# EAGLE board TRN_Open_Servo (EAGLE 7.1.0)
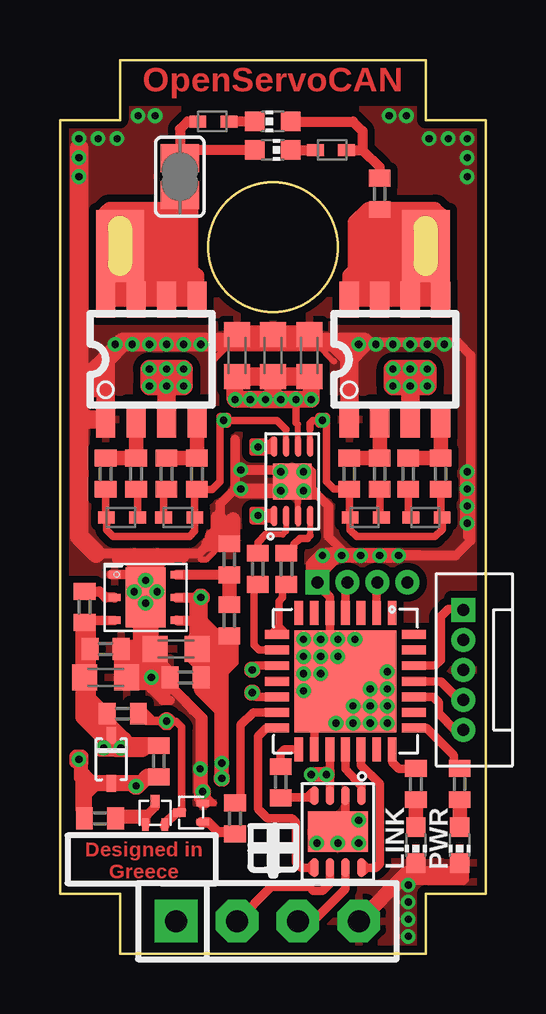
[diagram p0: board, top side]
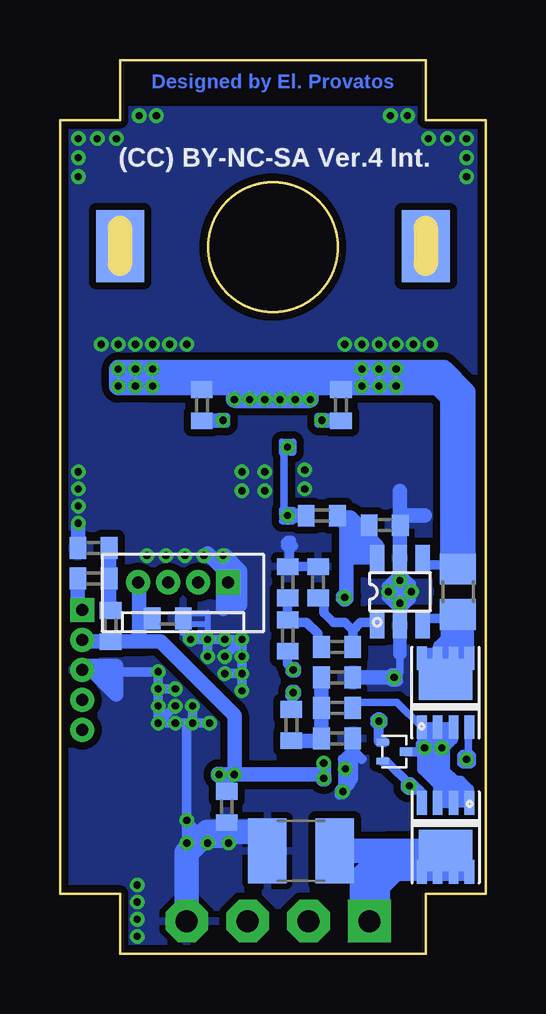
[diagram p1: board, bottom side, seen from below]

Size 17.75 x 37.25 mm. Coordinates in mm from the lower left corner, seen from the top.
Outline: 0,2.5 2.5,2.5 2.5,0 15.25,0 15.25,2.5 17.75,2.5 17.75,34.75 15.25,34.75 15.25,37.25 2.5,37.25 2.5,34.75 0,34.75 0,2.5
Outline: circle at 8.88,29.45 radius 2.7
Copper layers (1*16): Top 0.035mm / dielectric 1.5mm / Bottom 0.035mm
Design rules "SeeedStudio_2layer_DRU_no_angle_20140221": minimum track width 6mil, minimum drill 12mil, track to track 6mil, track to pad 6mil, pad to pad 6mil, via to via 6mil, smd to smd 0mil, copper to edge 10mil, drill to drill 10mil, minimum pad ring 10mil, minimum via ring 6mil, stop-mask expansion 2mil, vias tented up to drill 100mil, thermal gap 10mil
Holes 5.4 mm at 8.88,29.45
tRestrict: area 15.6,4.3 to 16,4.4; area 14,4.3 to 14.3,4.4; area 2.9,35.6 to 14.9,36.5; area 11,23 to 11,23.1; area 7.1,24.8 to 10.6,24.9; area 9.9,15.4 to 10,15.6; area 8,16.2 to 8.1,16.4; area 6.5,16.1 to 6.6,16.3; area 12.3,26.5 to 15.7,26.6; area 2.1,26.5 to 5.5,26.6; area 5.2,11.4 to 5.2,11.6; area 5.4,11 to 5.5,11.2
bRestrict: area 2.9,35.6 to 14.9,36.5

## Footprints (pad centres in the part's own frame; a part is rotated, then mirrored left to right if it is on the bottom)
C0402 = smd 0.7 x 0.9: 1 -0.65,0; 2 0.65,0
C0603K = smd 1.05 x 1.08: 1 -0.875,0; 2 0.875,0
C1210 = smd 1.6 x 2.7: 1 -1.4,0; 2 1.4,0
SOD523 = smd 0.7 x 0.5: A 0.7,0; C -0.6,0
SOD-323 = smd 0.403 x 0.71: A 0,0.995; K 0,-0.995
TDFN-8-EP = smd 0.85 x 0.25: 1 -1.45,0.75; 2 -1.45,0.25; 3 -1.45,-0.25; 4 -1.45,-0.75; 5 1.45,-0.75; 6 1.45,-0.25; 7 1.45,0.25; 8 1.45,0.75 | smd 1.5 x 1.6: EP 0,0
SOT-23-6 = smd 1.1 x 0.6: 1 -1.4,0.95; 2 -1.4,0; 3 -1.4,-0.95; 4 1.4,-0.95; 5 1.4,0; 6 1.4,0.95
DFN6-3X3 = smd 0.5 x 0.3: 1 -1.3,0.95; 2 -1.3,0; 3 -1.3,-0.95; 4 1.3,-0.95; 5 1.3,0; 6 1.3,0.95 | smd 1.68 x 2.5: EP 0,0
VDFN-8-EP = smd 0.8 x 0.35: 1 -1.5,0.975; 2 -1.5,0.325; 3 -1.5,-0.325; 4 -1.5,-0.975; 5 1.5,-0.975; 6 1.5,-0.325; 7 1.5,0.325; 8 1.5,0.975 | smd 1.7 x 2.5: EP 0,0
QFN-28 = smd 1 x 0.37: 1 -2.85,1.95; 2 -2.85,1.3; 3 -2.85,0.65; 4 -2.85,0; 5 -2.85,-0.65; 6 -2.85,-1.3; 7 -2.85,-1.95; 15 2.85,-1.95; 16 2.85,-1.3; 17 2.85,-0.65; 18 2.85,0; 19 2.85,0.65; 20 2.85,1.3; 21 2.85,1.95 | smd 0.37 x 1: 8 -1.95,-2.85; 9 -1.3,-2.85; 10 -0.65,-2.85; 11 0,-2.85; 12 0.65,-2.85; 13 1.3,-2.85; 14 1.95,-2.85; 22 1.95,2.85; 23 1.3,2.85; 24 0.65,2.85; 25 0,2.85; 26 -0.65,2.85; 27 -1.3,2.85; 28 -1.95,2.85 | smd 4.25 x 4.25: EP 0,0
SIP-100-04 = drill 0.914 pad 1.778 square: 1 -3.81,0 | drill 0.914 pad 1.778 octagon: 2 -1.27,0; 3 1.27,0; 4 3.81,0
PICOBLADE-5 = drill 0.5 pad 0.813 square: 1 0,2.5 | drill 0.5 pad 0.813: 2 0,1.25; 3 0,0; 4 0,-1.25; 5 0,-2.5
PICOBLADE-4 = drill 0.5 pad 0.813 square: 1 0,1.875 | drill 0.5 pad 0.813: 2 0,0.625; 3 0,-0.625; 4 0,-1.875
CHIP-LED0603 = smd 0.8 x 0.8: A 0,-0.75; C 0,0.75
PLATED_SLOT = smd 2 x 3: P$1 0,0 | smd 2 x 3 bottom: P$2 0,0
R0402 = smd 0.7 x 0.9: 1 -0.65,0; 2 0.65,0
R0805 = smd 1.3 x 1.5: 1 -0.95,0; 2 0.95,0
SJ = smd 1.168 x 1.6: 1 -0.762,0; 2 0.762,0
SO-8 = smd 1.505 x 0.802: 1 -2.5,1.905; 2 -2.5,0.635; 3 -2.5,-0.635; 4 -2.5,-1.905; 5 2.5,-1.905; 6 2.5,-0.635; 7 2.5,0.635; 8 2.5,1.905
POWERPAK-1212-8 = smd 0.99 x 0.405: 1 -1.435,0.99; 2 -1.435,0.33; 3 -1.435,-0.33; 4 -1.435,-0.99; 5 1.435,-0.99; 6 1.435,-0.33; 7 1.435,0.33; 8 1.435,0.99 | smd 1.725 x 2.235: EP 0.557,0
SOT-723-3 = smd 0.27 x 0.52: 1 -0.4,-0.49; 2 0.4,-0.49 | smd 0.36 x 0.52: 3 0,0.49

## Placement (x,y rotation side)
C1  100n  [C0402]  4.13,8.02 270 top
C2  100n  [C0402]  5.24,11.51 180 top
C3  100n  [C0402]  1.91,12.7 0 top
C4  1u  [C0603K]  1.91,11.51 0 top
C5  1u  [C0603K]  4.84,12.7 180 top
C6  1u  [C0603K]  7.38,24.92 90 top
C7  1u  [C0603K]  8.89,24.92 90 top
C8  1u  [C0603K]  10.4,24.92 90 top
C9  100n  [C0402]  6.19,8.97 0 bottom
C10  10n  [C0402]  8.26,15.48 90 bottom
C11  100n  [C0402]  16.35,16.91 0 bottom
C12  10uF  [C1210]  7.7,4.29 180 bottom
C13  100n  [C0402]  10.79,6.11 270 bottom
C14  100n  [C0402]  13.26,13.97 0 bottom
C15  100n  [C0402]  4.21,17.86 0 bottom
D1  PMEG3010  [SOD523]  4.92,18.18 0 top
D2  PMEG3010  [SOD523]  2.54,18.18 0 top
D3  PMEG3010  [SOD523]  15.24,18.18 0 top
D4  PMEG3010  [SOD523]  12.7,18.18 0 top
D5  12V  [SOD-323]  2.14,8.1 180 top
D6  PMEG3010  [SOD523]  11.35,33.5 180 top
D7  PMEG3010  [SOD523]  6.35,34.69 0 top
IC1  [TDFN-8-EP]  9.68,19.68 90 top
IC2  [SOT-23-6]  3.57,15.08 90 bottom
IC3  [DFN6-3X3]  3.57,14.84 0 top
IC4  [VDFN-8-EP]  11.59,5.08 270 top
IC5  [QFN-28]  11.91,11.35 270 top
J1  J-04-SIP-100  [SIP-100-04]  8.65,1.35 0 top
J2  [PICOBLADE-5]  16.83,11.83 0 top
J3  [PICOBLADE-4]  12.62,15.48 270 bottom
LED1  [CHIP-LED0603]  16.67,4.52 180 top
LED2  [CHIP-LED0603]  14.84,4.52 180 top
LED3  [CHIP-LED0603]  8.88,33.5 270 top
LED4  [CHIP-LED0603]  8.88,34.69 90 top
PAD1  [PLATED_SLOT]  2.5,29.5 0 top
PAD2  [PLATED_SLOT]  15.25,29.5 0 top
R1  22  [R0402]  4.45,20 90 top
R2  150  [R0402]  5.71,20 90 top
R3  22  [R0402]  3.17,20 90 top
R4  150  [R0402]  1.91,20 90 top
R5  22  [R0402]  14.53,20 270 top
R6  150  [R0402]  15.88,20 270 top
R7  22  [R0402]  13.34,20 270 top
R8  150  [R0402]  12.06,20 270 top
R9  100K  [R0402]  1.03,14.45 270 top
R10  10K  [R0402]  7.06,16.43 90 top
R11  31K6  [R0402]  7.06,13.89 90 top
R12  100K  [R0402]  2.62,10 180 top
R13  100K  [R0402]  1.67,5.64 180 top
R14  100K  [R0402]  7.3,5.64 270 top
R15  10K  [R0402]  6.03,22.86 90 bottom
R16  10K  [R0402]  11.83,22.86 270 bottom
R17  499K  [R0402]  6.19,10.24 0 bottom
R18  100K  [R0402]  6.19,11.51 180 bottom
R19  470  [R0402]  8.1,9.53 270 bottom
R20  21K  [R0402]  6.99,15.48 90 bottom
R21  470  [R0402]  6.19,12.78 180 bottom
R22  470  [R0402]  8.26,13.26 270 bottom
R23  10K  [R0402]  6.83,18.26 0 bottom
R24  470  [R0402]  9.21,7.14 90 top
R25  470  [R0402]  16.35,15.64 180 bottom
R26  4K7  [R0402]  15.64,13.65 270 bottom
R27  470  [R0402]  16.67,7.06 90 top
R28  470  [R0402]  14.84,7.06 90 top
R29  470  [R0402]  8.26,16.03 90 top
R30  4K7  [R0402]  13.34,31.67 90 top
R31  470  [R0402]  9.45,16.03 90 top
R_SNS  20mΩ  [R0805]  1.15,15.08 90 bottom
SJ1  [SJ]  5,32.38 90 top
T1  DMC4015SSD-13  [SO-8]  3.81,24.77 90 top
T2  DMC4015SSD-13  [SO-8]  13.97,24.77 90 top
T3  [POWERPAK-1212-8]  1.67,10.87 90 bottom
T4  [POWERPAK-1212-8]  1.67,4.84 270 bottom
T5  [SOT-723-3]  3.81,8.41 270 bottom
T6  [SOT-723-3]  3.97,5.87 0 top
T7  [SOT-723-3]  5.48,5.87 90 top
U$1  CC-NC-BCNIX  [CC-NC-B_NIX]  -0.32,-0.4 0 top

## Library data of the parts
C1-C11 C13-C15 R1-R31 R_SNS = rcl
C12 = adafruit
D1-D4 D6 D7 = diode
D5 IC1-IC5 J2 J3 PAD1 PAD2 T1-T7 = TRN_Open_Servo
J1 = con-headers-jp
LED1-LED4 = led
SJ1 = jumper
U$1 = cc-by-nc-sa

## Nets
+5V: C2.1 C5.1 C13.1 C14.1 C15.1 IC2.6 IC3.4 IC3.5 IC4.3 IC5.17 J2.2 J3.4 R11.1 R23.2 R26.2
CAN_NSIL: IC4.5 IC5.14
CAN_RXD: IC5.15 R24.2
CAN_STB: IC4.8 IC5.19
CAN_TXD: IC4.1 IC5.18
ENCOD_A: IC5.2 J3.3
ENCOD_B: IC5.4 J3.2
GND: C2.2 C3.2 C4.2 C5.2 C6.2 C7.2 C8.2 C9.2 C10.2 C11.1 C12.2 C13.2 C14.2 C15.2 IC1.3 IC1.EP IC2.2 IC2.5 IC3.1 IC3.EP IC4.2 IC4.EP IC5.5 IC5.16 IC5.EP J1.4 J2.3 J3.1 LED1.C LED2.C R10.2 R18.1 R20.2 T1.1 T2.1 T7.2
LED_A: IC5.22 R27.2
LED_B: IC5.21 R28.2
MOTOR+: PAD1.P$1 PAD1.P$2 SJ1.1 T1.5 T1.6 T1.7 T1.8
MOTOR-: PAD2.P$1 PAD2.P$2 R30.1 T2.5 T2.6 T2.7 T2.8
N$1: D7.C LED3.A SJ1.2
N$2: IC3.2 R9.1
N$3: D6.C LED4.A R30.2
N$4: D3.A D4.C IC1.5 R6.2 R8.2 R16.2
N$5: D1.A D2.C IC1.7 R2.1 R4.1 R15.1
N$6: D1.C R1.1
N$7: R1.2 R2.2 T1.4
N$8: R3.2 R4.2 T1.2
N$9: D2.A R3.1
N$10: D3.C R5.2
N$11: R5.1 R6.1 T2.4
N$12: R7.1 R8.1 T2.2
N$13: D4.A R7.2
N$14: IC3.6 R10.1 R11.2
N$15: C6.1 C7.1 C8.1 IC1.6 IC2.4 R15.2 R16.1 R_SNS.2 T1.3 T2.3
N$16: R12.1 T5.1 T6.2 T7.3
N$17: IC4.7 J1.3
N$18: C1.2 D5.A R13.2 T3.4 T4.4 T5.2
N$19: R13.1 T6.1 T6.3
N$20: IC4.6 J1.2
N$21: C9.1 R17.1 R18.2 R19.2
N$22: IC1.1 IC1.8 R23.1
N$23: R14.2 T7.1
N$24: IC5.26 J2.1 R25.2
N$25: C11.2 R25.1 R26.1
N$27: LED1.A R27.1
N$28: IC2.1 R20.1 R21.1
N$29: IC5.24 J2.5
N$30: IC5.25 J2.4
N$31: C10.1 R21.2 R22.1
N$32: IC4.4 R24.1
N$33: D6.A LED3.C
N$34: D7.A LED4.C
N$35: LED2.A R28.1
N$37: IC1.2 R29.2
N$38: IC1.4 R31.2
PWM_A: IC5.9 R29.1
PWM_B: IC5.8 R31.1
PWR_EN: IC5.13 R14.1
PWR_V+: C1.1 C3.1 C4.1 D5.K IC3.3 R9.2 R12.2 R17.2 T3.1 T3.2 T3.3 T4.1 T4.2 T4.3 T5.3
PWR_VIN: C12.1 J1.1 T4.5 T4.6 T4.7 T4.8 T4.EP
TO_ADC_I: IC5.10 R22.2
TO_ADC_V: IC5.12 R19.1
V+: IC2.3 R_SNS.1 T3.5 T3.6 T3.7 T3.8 T3.EP

## Tracks (layer width: path | path; a pad name or v marks a point on that pad's centre or on a via)
+5V  (via drill 0.3 pad 0.61)
  Top 0.305: 5.56,14.84 5.56,13.26 5.4,13.1 6.83,13.1 | 6.83,13.1 6.83,13.34 5.87,13.34 5.95,13.41 6.99,13.41 7.3,13.1 7.3,12.14 6.11,10.95 6.11,11.27 6.75,11.91 6.91,12.06 6.59,12.06 6.11,11.59 6.11,11.99 6.59,12.46 6.83,12.46 6.99,12.3 5.4,12.3 6.03,11.67 | v5.87,14.84 5.87,14.05 6.83,13.1
  Top 0.35: 11.1,7.48 v11.11,7.46 | v11.11,7.46 11.11,7.54 11.19,7.62 | 11.19,7.62 11.27,7.54 | 11.27,7.54 11.27,7.38 11.19,7.3 11.03,7.3 10.95,7.38 10.95,7.54 11.03,7.62 11.19,7.62 | v11.11,7.45 v11.11,7.46 | IC4.3 11.26,7.31 v11.11,7.46 | 11.19,7.62 11.27,7.62 11.27,7.54 | IC5.17 11.26,7.61 v11.11,7.46 | 6.75,7.46 6.67,7.46 6.59,7.38 6.59,7.22 6.67,7.14 6.83,7.14 6.91,7.22 6.91,7.38 6.83,7.46 6.75,7.46 | 6.75,7.46 v6.75,7.3
  Top 0.405: 7.06,12.78 7.06,11.99 6.51,11.43 5.87,11.43
  Top 0.406: IC3.5 5.56,14.84 v5.87,14.84 5.87,15 | 5.87,15 5.95,15 6.03,14.92 6.03,14.76 5.95,14.68 5.79,14.68 5.71,14.76 5.71,14.92 5.79,15 5.87,15 | IC3.4 5.87,13.89 | R11.1 7.06,12.78 6.99,12.7
  Top 0.6: C5.1 6.99,12.7 6.99,13.26 | 6.83,13.1 6.83,11.99 6.75,11.91 6.75,10.72 | 6.75,9.68 6.75,10.72 | 6.75,10.72 6.51,10.95
  Top 0.606: v5.87,14.84 5.87,13.89 5.87,13.34 5.87,12.86 C5.1 5.89,12.53 C2.1 5.89,11.02 6.75,10.16 6.75,9.68 v6.75,7.3 | v10.48,7.46 v11.11,7.46
  Bottom 0.35: 10.95,7.46 10.95,7.54 11.03,7.62 11.19,7.62 11.27,7.54 11.27,7.38 11.19,7.3 11.03,7.3 10.95,7.38 10.95,7.46 | 10.95,7.46 v11.11,7.46 10.79,7.46 | 6.75,7.46 6.83,7.46 6.91,7.38 6.91,7.22 6.83,7.14 6.67,7.14 6.59,7.22 6.59,7.38 6.67,7.46 6.75,7.46 | 6.75,7.46 v6.75,7.3 | C14.1 14.45,13.97
  Bottom 0.405: 5.87,16.19 5.87,16.75 5.64,16.51 | 5.87,18.24 R23.2 | J2.2 16.75,13 | 14.19,13 14.45,13.26 14.45,13.97 | 14.68,13.02 14.49,13.22 | 14.45,15.43 J3.4
  Bottom 0.406: 5.87,15 v5.87,14.84 5.95,14.92 5.95,15 | 5.87,15 5.95,15 | 5.95,15 6.03,14.92 6.03,14.76 5.95,14.68 5.79,14.68 5.71,14.76 5.71,14.92 5.79,15 5.87,15 | 5.87,16.19 5.58,16.48 | 5.87,16.75 5.87,18.26 R23.2
  Bottom 0.6: v10.48,7.46 10.48,9.92 13.56,13 14.19,13 R26.2 16.75,13 | C15.1 4.84,17.84 4.84,17.3 4.52,16.98 IC2.6 4.52,16.51 5.24,16.51 | 5.71,16.51 5.24,16.51 | 5.24,16.51 5.71,16.99 5.71,17.7 | 5.71,17.78 5.71,17.7 | 5.71,17.7 5,16.99 | v5.87,14.84 5.79,14.92 5.79,17.87 R23.2 | 14.45,15.43 14.45,13.26 14.49,13.22
  Bottom 0.606: v10.48,7.46 v11.11,7.46 | C13.1 10.79,7.46 v10.48,7.46 | v10.48,7.46 6.75,7.46 v6.75,7.94
  Bottom 0.61: C15.1 5.32,17.86 5.64,18.18 6.1,18.18 R23.2
CAN_NSIL
  Top 0.35: IC4.5 10.61,3.67 10.56,3.73 | 10.56,3.73 10.56,3.41 10.4,3.57 | 10.56,3.73 10.4,3.57 | 10.4,3.57 10.08,3.57 9.84,3.81 9.84,5.48 9.68,5.64 8.65,5.64 8.26,6.03 8.26,9.05 8.61,9.4 IC5.14
CAN_RXD
  Top 0.35: IC5.15 9.37,8.5 9.21,8.33 R24.2
CAN_STB
  Top 0.35: IC4.8 12.56,3.67 12.62,3.73 12.78,3.57 | 12.62,3.41 12.78,3.57 | 12.78,3.57 13.18,3.57 13.34,3.73 13.34,7.06 12.56,7.84 IC5.19
CAN_TXD
  Top 0.35: IC4.1 12.56,6.96 11.91,7.7 IC5.18
ENCOD_A
  Top 0.35: IC5.2 13.21,15.44 J3.3
ENCOD_B
  Top 0.35: IC5.4 11.91,15.39 J3.2
GND  (via drill 0.3 pad 0.61)
  Top 0.25: IC1.3 9.93,19.68 9.76,19.68
  Top 0.254: v5.87,25.4 7.06,25.4 6.35,24.69 | v12.46,25.4 10.72,25.4 | 10.64,25.4 10.72,25.4 | 10.72,25.4 11.43,24.69 | 5.87,16.43 6.11,16.43 6.75,17.07 | 7.38,17.86 7.38,17.62 | 5.48,10.08 5.48,10.4 | 5.48,10.4 4.37,11.51 | 5.48,10.4 6.03,9.84 6.03,6.83 v5.95,6.75 6.43,6.27 5.87,6.27 5.71,6.43 5.71,7.54 5.87,7.7
  Top 0.305: 16.67,3.02 14.68,3.02 v14.53,2.86 | 16.67,3.02 16.67,3.33 | 16.67,3.02 16.83,3.02 16.91,3.1 16.91,3.57 | v3.81,11.51 4.05,11.75 4.68,11.75 4.21,12.22 4.21,12.38
  Top 0.35: IC5.16 10.61,10.05 11.51,10.95 IC5.EP | IC4.2 11.91,5.41 IC4.EP | T7.2 6.03,6.34 v5.95,6.75 6.11,6.75 | 6.11,6.75 6.11,6.59 6.03,6.51 | 6.11,6.75 6.11,6.83 5.95,7.06 | 17.14,17.22 16.99,17.38 v16.99,17.94 | v10.87,13.1 11.26,13.1 IC5.5 11.26,14.86 10.75,15.37 J3.1 10.75,16.46 v10.95,16.59
  Top 0.405: 3.38,16.67 5.79,16.67 6.03,16.91 | 6.19,17.07 6.67,17.54 6.67,18.73 7.3,19.37 7.3,20.32 | v4.05,15.08 v3.1,15.08 | 1.51,16.67 3.38,16.67 | 3.38,16.67 IC2.5 v3.57,15.56 | IC3.1 2.15,15.79 2.14,15.8 3.33,15.8 v3.57,15.56 | IC3.EP v3.57,15.56 | 16.11,16.59 11.91,16.67 11.19,17.38 11.19,18.65 10.72,19.13 10.48,19.13 10.24,19.13 9.76,19.68 IC1.EP 9.68,20.16 7.46,20.16 7.3,20.32 | 12.7,25.48 16.59,25.48 17.14,24.92 17.14,17.22 16.51,16.59 16.11,16.59 | 7.3,21.43 7.3,20.32 | 16.11,16.59 v14.13,16.59 | v12.46,5.56 12.46,5.08 IC4.EP | v11.51,9.6 11.51,10.95 v10.16,10.95 | v3.81,11.51 3.81,11.03 4.29,10.56 4.6,10.56
  Top 0.406: R10.2 6.21,17.08 6.19,17.07 6.03,16.91 | C4.2 2.94,11.51 | C2.2 4.45,11.51 | C2.2 4.68,11.51 | T7.2 6.11,6.27 5.87,6.27 5.87,7.7 5.87,9.84 4.59,11.13 C2.2 | v3.57,15.56 3.57,16.51 4.45,16.51 | 5.16,16.51 4.68,16.51 | 4.68,16.51 4.45,16.51 | 4.45,16.51 4.13,16.19 3.02,16.19 2.7,16.51 2.46,16.51 2.38,16.43 4.6,16.43 4.68,16.51 | 3.81,11.67 3.97,11.67 3.97,11.35 3.65,11.35 3.65,11.67 3.81,11.67 | v10.16,20.08 10.24,20.16 10.4,20.16 10.48,20.08 10.48,19.13 10.32,19.29 v10.16,19.29 10.32,19.13 10.72,19.13 10.16,19.68 v10.16,20.08
  Top 0.6: 10.72,15.48 10.72,15.8 11.59,16.67 | v9.21,20.08 v9.21,19.29 7.54,19.29 v7.54,19.37 | v3.81,11.51 3.57,11.27 3.1,11.27 | v10.95,16.59 10.95,15.32 10.56,15.32 10.56,16.19 v10.95,16.59
  Top 0.606: C4.2 2.56,11.73 C3.2 3.33,12.7 | 3.57,12.7 3.33,12.7 | C5.2 3.57,12.7 | 3.57,12.7 v3.57,14.61 | v12.54,16.59 v13.34,16.59 v14.13,16.59 v12.54,16.59 | v12.54,16.59 v11.75,16.59 11.59,16.67 v10.95,16.59 | v16.99,17.94 v16.99,18.65 v16.99,19.37 v16.99,20.08 | 14.84,3.33 16.37,3.33 16.67,3.63 LED1.C | 14.84,3.33 14.45,3.33 J1.4 | LED2.C 14.84,3.33 | v3.81,11.51 3.81,14.37 v3.57,14.61 | v3.57,14.61 3.33,14.37 3.33,12.7 | 4.05,15.8 4.05,16.59 | 3.1,15.64 3.1,16.59 | 6.75,17.07 6.35,17.07 | 6.19,17.07 6.35,17.07 | 6.35,17.07 6.35,17.38 6.59,17.62 6.59,18.18 6.91,17.86 6.91,17.14 7.22,17.14 7.22,18.1
  Top 0.61: v3.81,11.51 4.37,11.51 4.45,11.51 | v3.81,11.51 2.94,11.51 3.02,11.59 3.02,12.22 3.33,12.22 3.33,11.59 4.13,11.59 4.13,12.86 4.05,12.78 2.7,12.78 3.81,11.67 v3.81,11.51 | v3.81,11.51 4.37,10.95
  Top 0.762: 1.91,24.77 T1.1 0.79,22.27 | 1.91,24.77 2.62,25.48 10.4,25.48 | 10.4,25.48 11.43,25.48 | 12.06,24.84 12.7,25.48 11.43,25.48 | 11.43,25.48 12.06,24.84 | 12.06,24.84 T2.1 | 0.79,22.27 0.79,23.65 1.35,24.21 | 1.91,24.77 1.35,24.21 | 1.35,24.21 1.35,23.57 | 1.35,23.57 1.83,23.57 | 1.35,23.57 0.95,23.57 0.79,23.73 0.79,33.58 | 0.79,22.27 0.79,17.38 1.51,16.67 | C6.2 C7.2 C8.2 10.4,25.48
  Bottom 0.254: 12.54,13.34 12.46,13.34 | 12.46,13.34 11.83,13.34 v11.59,13.1 | 12.46,13.34 12.3,13.18 v12.3,13.1 | 12.46,13.34 12.46,13.73 11.59,13.73 v11.59,13.1 | 12.46,13.34 12.54,13.41 12.54,14.13 12.46,14.21 11.59,14.21 v11.59,13.1
  Bottom 0.305: R18.1 5.48,11.51 | IC2.2 3.57,11.75 v3.81,11.51 | v3.57,14.61 v3.1,15.08 | 3.49,15.48 v3.57,15.56 v4.05,15.08 3.65,14.68 v3.57,14.61 | v3.57,14.61 3.57,13.73
  Bottom 0.35: C11.1 16.99,16.97 | 6.11,6.75 v5.95,6.75 6.03,6.83 6.11,6.83 | 6.11,6.75 6.11,6.83 | 6.11,6.83 6.03,6.91 5.95,6.91 5.87,6.83 5.87,6.67 5.95,6.59 6.11,6.59 6.11,6.75 | C14.2 12.61,13.4 12.54,13.34 v12.3,13.1 | C13.2 10.79,4.68 v10.72,4.6
  Bottom 0.405: 3.65,14.76 3.57,14.68 v3.57,14.61 3.57,13.49 3.65,13.41 3.65,12.46 3.49,12.46 3.49,13.41 | 3.65,14.76 IC3.EP | 3.65,14.76 3.73,14.76 v4.05,15.08 | 3.57,15.48 3.49,15.48 | 3.49,15.48 v3.1,15.08 3.33,15.08 IC3.EP | v3.57,15.56 IC3.EP | R20.2 C10.2 8.18,16.21 8.18,17.22 | 8.18,17.22 8.26,17.22 8.33,17.14 | 8.33,16.99 8.26,16.91 | 8.1,16.91 8.02,16.99 | 8.1,17.22 8.18,17.22 | J2.3 16.75,11.75 v13.65,11.75 v13.65,11.03 | v13.65,11.03 v12.94,11.03 | v13.65,11.03 v13.65,10.32 v13.65,9.6 | v13.65,9.6 v12.94,9.6 v12.22,9.6 | v12.22,9.6 v11.51,9.6 | v12.22,9.6 v12.22,10.32 | v12.94,10.32 v13.65,9.6 | v10.16,10.95 v10.16,11.67 | v10.16,11.67 v10.16,12.38 v10.16,13.1 | v10.16,13.1 v10.87,13.1 v11.59,13.1 | v11.59,13.1 v12.3,13.1 | v11.59,13.1 v11.59,12.38 | v10.87,11.67 v10.16,11.67 | v10.87,12.38 v10.16,13.1 | v10.72,4.6 v12.46,4.6 v12.46,5.56 | v12.46,5.56 v11.59,4.6 | v12.46,5.56 J1.4 | v12.46,5.56 12.46,9.6 v12.22,9.6 | 5.54,7.24 v5.95,6.75 | 3.57,16.03 3.57,15.88 3.65,15.8 | 4.13,15.32 3.65,15.8 | 3.65,15.8 3.65,16.03 3.49,16.03 3.49,15.8 | 3.49,15.48 3.49,15.8 | 3.49,15.8 3.1,15.4 3.1,14.76 3.49,14.37 3.49,13.89 3.65,13.89 3.65,14.37 | 3.65,14.68 3.65,14.37 | 3.65,14.37 4.13,14.84
  Bottom 0.406: v3.57,14.61 IC3.EP 3.57,15.48 v3.57,15.56 3.57,16.03 IC2.5 | 3.81,11.67 v3.81,11.51 3.81,11.43 | 3.81,11.67 3.97,11.67 3.97,11.35 3.65,11.35 3.65,11.67 3.81,11.67 | C9.2 5.54,7.24 | 5.48,8.41 5.48,8.65 5.56,8.65 5.64,8.73 5.64,7.06 v5.95,6.75 5.95,8.1 5.56,8.49 5.48,8.41 | 5.48,8.41 5.16,8.1
  Bottom 0.6: 10.95,15.56 10.87,15.48 10.72,15.48 10.72,15.8 11.59,16.67 v11.75,16.59 | 10.95,15.56 10.95,14.37 | 10.95,15.56 v10.95,16.59 | v10.95,16.59 10.87,16.59 10.24,15.95 10.24,14.53 10.48,14.53 10.48,16.11 v10.95,16.59 | 16.99,16.97 v16.99,17.94 | v3.81,11.51 5.48,11.51 | J2.3 16.67,11.99 15.4,11.99 15.4,10.79 16.35,11.75 16.83,11.75 J2.3
  Bottom 0.61: v3.57,15.56 3.57,18.26 | 3.57,19.29 3.57,18.26 | 3.57,18.26 2.54,18.26
  Bottom 1.016: C12.2 9.1,4.81 9.37,5.08 IC4.EP 12.46,4.21 J1.4
  other vias: 14.53,0.71 14.53,1.43 14.53,2.14 3.73,25.4 4.45,25.4 5.16,25.4 3.02,25.4 2.3,25.4 14.61,25.4 15.32,25.4 16.03,25.4 13.89,25.4 13.18,25.4 7.54,20.16 5.85,7.7 16.99,33.97 16.99,33.18 16.19,33.97 16.99,32.38 15.4,33.97 13.73,34.92 14.45,34.92 0.79,33.97 1.59,33.97 2.38,33.97 0.79,33.18 0.79,32.38 3.25,34.92 3.97,34.92
  pour Bottom (isolate 0.305): -0.24,37.47 -0.24,-0.24 18.02,-0.24 18.02,37.54 -0.24,37.54
  pour Top (isolate 0.305): -0.24,37.54 -0.24,-0.24 18.02,-0.24 18.02,37.54
LED_A
  Top 0.35: IC5.22 15.29,9.4 16.43,8.26 16.43,7.95 R27.2
LED_B
  Top 0.35: IC5.21 13.86,7.97 14.13,7.7 14.91,7.7 R28.2
MOTOR+  (1 unrouted)
  Top 0.606: 4.45,29.45 4.45,29.53 4.45,30.24 2.94,30.24 2.94,29.13 3.25,29.45 4.45,29.45 | 5.71,27.86 T1.5 5.71,27.23 5.68,27.27 T1.7 T1.8 | 5.71,27.86 5.71,28.26 5.48,28.5 | 4.45,28.89 4.68,28.89 5.08,28.89 5.48,28.5 | 5.48,28.5 5.48,29.61 5.48,30.48 4.92,31.04 2.06,31.04 1.91,30.88 1.91,30.48 2.5,29.89 PAD1.P$2 | T1.6 4.45,28.73 | 4.45,28.73 4.45,28.89 | 4.45,29.45 4.45,28.89 | 4.45,28.73 4.37,28.65 3.17,28.65 3.17,28.02 3.33,27.86 | 3.33,27.86 1.91,27.86 | 3.33,27.86 5.71,27.86
  Top 0.61: SJ1.1 5.48,31.78 5.48,29.61 | 4.45,29.53 4.45,30.64 | 4.45,31.11 4.45,30.64 | 4.45,30.64 3.41,30.64 3.41,29.84 5,29.84 5,30.64 4.84,30.64 4.84,29.53 5,29.53 5,28.34 4.92,28.34 4.92,28.26 | 4.92,28.26 5.16,28.26 | 4.92,28.26 3.25,28.26 3.25,28.89 4.68,28.89
MOTOR-  (1 unrouted)
  Top 0.606: R30.1 13.34,30.24 | 13.34,30.24 13.34,30 13.34,29.45 | 13.34,29.45 13.34,28.89 | 13.34,28.65 T2.7 | T2.8 12.06,27.3 | 12.06,27.86 12.06,28.26 12.3,28.5 | 13.34,28.89 12.7,28.89 12.3,28.5 | 12.3,28.5 12.3,30.48 12.86,31.04 15.64,31.04 15.88,30.8 15.88,28.65 | 15.88,27.86 T2.5 T2.6 T2.7 | T2.7 12.11,27.27 12.06,27.3 | 12.06,27.3 12.06,27.86 | 12.06,27.86 15.88,27.86 | 15.88,27.86 15.88,28.65 | 15.88,28.65 13.34,28.65 | 13.34,28.65 13.34,28.89 | 13.34,29.45 14.68,29.45 14.68,30.24 14.51,30.24 | 13.34,30.24 14.51,30.24 | 14.51,30.24 PAD2.P$2
  Top 0.61: 13.34,30 13.34,29.84 14.13,29.84 14.13,30.64 12.78,30.64 12.78,28.26 | 12.78,28.26 12.62,28.26 | 12.78,28.26 14.29,28.26 14.29,29.05 | 14.29,29.13 14.29,29.05 | 14.29,29.05 13.65,29.05
N$1
  Top 0.406: LED3.A 5,33.5 SJ1.2 5,34.37 5.32,34.69 D7.C
N$2
  Top 0.406: 2.3,14.84 IC3.2 1.91,14.84 1.65,15.1 R9.1
N$3
  Top 0.406: D6.C 12.62,33.5 | 12.62,33.5 13.34,32.78 R30.2 | LED4.A 12.22,34.69 12.62,34.29 12.62,33.5
N$4  (via drill 0.3 pad 0.61)
  Top 0.25: IC1.5 10.43,21.86
  Top 0.305: 12.06,18.13 R8.2 12.05,19.37 11.43,19.37 11.11,19.68 11.11,22.07 | D4.C 12.1,17.67 12.38,17.38 15.64,17.38 15.94,17.69 D3.A 15.88,18.16 R6.2 | 10.43,21.86 10.43,22.1 10.56,22.23 v10.95,22.23 | 10.87,22.07 11.11,22.07 | 11.11,22.07 11.11,22.3 | 11.03,22.38 11.11,22.38 11.11,22.3 | 11.11,22.3 11.03,22.38 | 11.03,22.38 10.79,22.38 10.79,22.15 10.87,22.07 | 10.87,22.07 10.87,22.15 v10.95,22.23 | 11.11,22.07 arc90 v10.95,22.23 | v10.95,22.23 10.79,22.23 10.79,22.07 10.87,22.07
  Top 0.406: 12.06,18.13 D4.C
  Bottom 0.305: 10.95,22.38 v10.95,22.23 11.03,22.3 11.03,22.38 | 10.95,22.38 11.03,22.38 | 11.03,22.38 11.11,22.38 11.11,22.07 10.79,22.07 10.79,22.38 10.95,22.38
  Bottom 0.606: R16.2 10.97,22.21 v10.95,22.23
N$5  (via drill 0.3 pad 0.61)
  Top 0.25: IC1.7 9.43,21.84
  Top 0.305: 1.91,18.13 R4.1 | D2.C 1.94,17.67 2.22,17.38 5.4,17.38 5.62,17.61 D1.A 5.62,19.26 | R2.1 6.33,19.35 6.67,19.68 6.67,22.07 | 6.67,22.07 6.67,22.38 6.99,22.38 6.99,22.07 6.67,22.07 | 9.43,21.84 9.05,22.23 v6.83,22.23 arc90 6.67,22.07
  Top 0.406: D2.C 1.91,18.13 | 5.62,19.26 R2.1
  Bottom 0.305: 6.83,22.38 6.99,22.38 6.99,22.07 6.67,22.07 6.67,22.38 6.83,22.38 | 6.83,22.38 v6.83,22.23
  Bottom 0.606: R15.1 6.81,22.21 v6.83,22.23
N$6
  Top 0.305: D1.C 4.32,19.23
  Top 0.406: 4.32,19.23 R1.1
N$7
  Top 0.6: R1.2 R2.2 T1.4
N$8
  Top 0.6: R4.2 R3.2 T1.2
N$9
  Top 0.305: D2.A 3.24,19.35
  Top 0.406: 3.24,19.35 R3.1
N$10
  Top 0.305: R5.2 14.53,18.21 D3.C
N$11
  Top 0.6: R5.1 R6.1 T2.4
N$12
  Top 0.6: R8.1 R7.1 T2.2
N$13
  Top 0.305: R7.2 13.34,18.16
  Top 0.406: 13.34,18.16 D4.A
N$14
  Top 0.406: IC3.6 6.81,15.79 R10.1
  Top 0.606: R11.2 R10.1
N$15  (via drill 0.3, 0.3 pad 0.3)
  Top 0.25: IC1.6 9.93,22.05 9.84,22.15
  Top 0.305: 9.84,22.15 v9.84,23.1
  Top 0.7: v7.94,23.1 v8.57,23.1 | v8.57,23.1 v9.21,23.1 | v9.21,23.1 v9.84,23.1 | v8.57,23.1 arc90 8.89,23.42 C7.1 | 10.48,23.65 v10.48,23.1 v9.84,23.1 | v9.21,23.1 v7.94,23.1 | v7.94,23.1 v7.3,23.1 | v9.84,23.1 v7.3,23.1 | v7.3,23.1 7.3,23.65
  Top 0.762: T1.3 v4.45,23.65 | v4.45,23.65 v4.45,24.37 | v4.45,23.65 v5.16,23.65 v5.16,24.37 v4.45,24.37 | v4.45,23.65 v3.73,23.65 v3.73,24.37 v4.45,24.37 | v15.32,24.37 v14.61,24.37 v13.89,24.37 | v14.61,23.65 v13.89,23.65 v13.89,24.37 | v13.89,24.37 v15.32,24.37 | v15.32,24.37 v15.32,23.65 v14.61,23.65 | v14.61,23.65 T2.3 | C6.1 C7.1 | C7.1 C8.1 | C7.1 10.48,24.05
  Bottom 0.305: 8.81,23.65 8.81,23.5 v9.21,23.1
  Bottom 0.405: IC2.4 2.62,16.19 1.31,16.19 arc90 R_SNS.2
  Bottom 0.406: 1.45,16.48 arc90 R_SNS.2
  Bottom 0.606: R15.2 6.03,23.65 | R16.1 11.83,23.65
  Bottom 0.7: 10.48,23.65 v10.48,23.1 v7.3,23.1 7.3,23.81
  Bottom 0.762: v5.16,24.37 v4.45,24.37 | v4.45,24.37 v3.73,24.37 v3.73,23.65 | v13.89,23.65 v15.32,23.65 v15.32,24.37 v14.61,24.37 | 13.89,24.29 v13.89,23.65 | v13.89,23.65 11.83,23.65 10.48,23.65 8.81,23.65 | v3.73,23.65 v5.16,23.65 v5.16,24.37 | v5.16,24.37 13.81,24.37 | 13.81,24.37 13.89,24.29 | 13.89,24.29 v13.89,24.37 v14.61,24.37 | v14.61,24.37 13.81,24.37 | 8.73,23.65 8.81,23.65 | 8.81,23.65 8.73,23.73 8.73,23.65 | 8.73,23.65 6.03,23.65 v3.73,23.65 | v3.73,23.65 1.98,23.65 1.51,23.18 1.51,18.02 | 1.51,18.02 0.79,18.02 | 0.79,18.02 0.79,23.42 1.75,24.37 v4.45,24.37 | 0.79,18.02 0.79,16.11 0.95,16.03 R_SNS.2 1.35,16.03 1.51,16.03 1.51,18.02
N$16  (via drill 0.3 pad 0.61)
  Top 0.254: v4.45,9.68 3.97,9.68 3.41,10.24 3.41,9.76 4.37,9.76
  Top 0.305: 5.08,5.97 5.08,9.45 4.84,9.68 v4.45,9.68 3.59,9.68 R12.1
  Top 0.405: T6.2 4.37,5.31 4.37,5.4 4.84,5.87 T7.3 5.08,5.97
  Top 0.406: 4.29,9.68 4.29,9.76 | 4.29,9.68 v4.45,9.68 4.37,9.76 4.29,9.76 | 4.29,9.68 4.29,9.6 4.37,9.53 4.52,9.53 4.6,9.6 4.6,9.76 4.52,9.84 4.37,9.84 4.29,9.76
  Bottom 0.406: 4.29,9.68 v4.45,9.68 4.45,8.81 T5.1 | 4.29,9.68 4.29,9.76 4.37,9.84 4.52,9.84 4.6,9.76 4.6,9.6 4.52,9.53 4.37,9.53 4.29,9.6 4.29,9.68 | T5.1 | 4.21,8.81 T5.1
N$17
  Top 0.35: IC4.7 11.91,2.71 10.56,1.35 J1.3
N$18  (via drill 0.3 pad 0.61)
  Top 0.254: 4.13,7.3 3.73,7.3 3.41,6.99 v3.17,6.99 3.1,7.06 3.1,7.14 3.02,7.22 2.22,7.22 | 0.95,7.22 0.87,7.22
  Top 0.305: 0.79,8.33 0.95,8.33 1.03,8.26 1.03,7.94 0.95,7.86 0.64,7.86 | 0.64,7.86 0.56,7.94 0.56,8.26 0.64,8.33 0.79,8.33 | 0.79,8.33 v0.79,8.1 0.64,7.94 0.64,7.86
  Top 0.405: C1.2 4.07,7.42 3.61,7.5 3.57,7.46 3.17,7.06
  Top 0.406: v3.17,6.99 3.17,7.06 3.17,7.14 | 3.17,7.14 3.25,7.14 | 3.25,7.14 3.33,7.06 3.33,6.91 | 3.33,6.91 3.25,6.83 3.1,6.83 3.02,6.91 3.02,7.06 3.1,7.14 3.17,7.14 | 3.25,7.14 3.25,7.06 v3.17,6.99 | v0.79,8.1 0.79,7.3 0.87,7.22 | 0.87,7.22 1.11,6.99 | 1.11,6.99 1.51,6.99 | 1.51,6.99 2.14,6.99 | 2.14,6.99 v3.17,6.99 | D5.A 2.14,6.99 | R13.2 1.02,6.99 1.11,6.99 | v3.17,6.99 3.25,6.99 3.33,6.91 | 3.33,6.91 3.73,7.3 3.57,7.46 3.33,7.22 2.22,7.22 1.35,7.22 | 0.95,7.22 0.79,7.38 v0.79,8.1 | v0.79,8.1 0.79,7.78 1.35,7.22 | 1.35,7.22 0.95,7.22 | 0.95,7.22 0.95,7.54 | 0.95,8.1 0.95,7.54 | 0.95,7.54 1.51,6.99 | 1.51,6.99 1.11,6.59 1.11,5.95 0.87,5.95 0.87,7.22
  Bottom 0.305: 1.03,8.18 0.92,8.29 0.92,8.22 v0.79,8.1 0.71,8.1 0.71,9.4 T3.4 | 1.03,8.18 1.03,7.94 0.95,7.86 0.64,7.86 0.56,7.94 0.56,8.26 0.64,8.33 0.95,8.33 1.03,8.26 1.03,8.18
  Bottom 0.405: T5.2 4.13,8.02 3.1,6.99 v3.17,6.99
  Bottom 0.406: T4.4 2.66,6.71 2.78,6.83 | 2.78,6.83 3.1,7.14 3.25,7.14 3.33,7.06 3.33,6.91 3.25,6.83 3.02,6.83 | 2.78,6.83 3.02,6.83 | 3.02,6.83 v3.17,6.99
N$19
  Top 0.254: 2.54,5.56 3.57,5.56 3.57,5.55 T6.1
  Top 0.405: T6.3 3.97,6.11 3.65,5.79 | T6.1 3.57,5.79 3.65,5.79 | R13.1 2.48,5.79 3.65,5.79
N$20
  Top 0.35: IC4.6 11.26,2.93 10.95,2.62 10.56,2.62 10.4,2.78 8.81,2.78 J1.2
N$21
  Bottom 0.405: 6.94,8.88 C9.1
  Bottom 0.6: 6.94,8.88 R19.2 | C9.1 R17.1 R18.2
N$22  (via drill 0.3 pad 0.61)
  Top 0.25: IC1.8 8.93,21.39 8.89,21.43 | 8.89,21.43 8.89,20.88 8.81,20.95 | 8.81,20.95 8.73,21.03 | 8.73,21.03 8.73,21.27 | 8.89,21.43 8.73,21.27 | 8.73,21.27 8.41,21.27 | 8.41,21.27 8.1,21.27 8.1,20.95 8.41,20.95 | 8.41,21.27 8.41,20.95 | 8.41,20.95 8.81,20.95 | 8.73,21.03 8.65,21.11 v8.26,21.11 8.26,21.35 | 8.26,21.35 8.02,21.35 8.02,20.88 8.49,20.88 8.49,21.35 8.26,21.35 | IC1.1 8.93,18.45 8.89,18.49 | 8.89,18.49 8.89,18.02 8.81,18.1 | 8.81,18.1 8.73,18.18 8.73,18.34 | 8.89,18.49 8.81,18.41 | 8.81,18.41 8.73,18.34 | 8.73,18.34 8.73,18.41 | 8.73,18.41 8.81,18.41 | 8.73,18.41 8.1,18.41 8.1,18.1 8.73,18.1 | 8.81,18.1 8.73,18.1 | 8.73,18.1 8.65,18.26 8.49,18.26 | 8.49,18.26 8.49,18.02 8.02,18.02 8.02,18.49 8.49,18.49 v8.26,18.26 8.49,18.26
  Bottom 0.25: 8.1,20.88 8.1,21.27 8.26,21.27 v8.26,21.11 8.18,21.03 8.18,20.88 | 8.1,20.88 8.18,20.88 | 8.18,20.88 8.49,20.88 8.49,21.35 8.02,21.35 8.02,20.88 8.1,20.88 | 8.49,18.41 8.26,18.41 v8.26,18.26 8.33,18.34 8.49,18.34 | 8.49,18.41 8.49,18.34 | 8.49,18.34 8.49,18.02 8.02,18.02 8.02,18.49 8.49,18.49 8.49,18.41
  Bottom 0.305: v8.26,21.11 8.41,21.11 8.41,18.41 v8.26,18.26
  Bottom 0.61: R23.1 v8.26,18.26
N$23
  Top 0.406: T7.1 6.11,5.47 6.11,5.48 | 6.11,5.48 5.87,5.48 | 6.11,5.48 6.19,5.48 6.59,5.08 7.29,5.08 R14.2
N$24
  Top 0.35: IC5.26 15.65,12 15.88,12.22 15.88,14.05 16.19,14.37 16.87,14.37 J2.1
  Bottom 0.35: 16.92,14.42 J2.1
  Bottom 0.6: R25.2 17,14.5 J2.1
N$25
  Bottom 0.35: 15.62,14.32 R26.1
  Bottom 0.6: C11.2 R25.1 15.7,14.37 R26.1
N$27
  Top 0.606: LED1.A R27.1
N$28
  Bottom 0.405: 5.56,12.79 R21.1 5.54,13.48 | 5.54,13.48 5.87,13.81 6.35,13.81 6.75,14.21 6.75,14.59 R20.1 | IC2.1 4.6,13.76 4.68,13.81 5.21,13.81 5.54,13.48
N$29
  Top 0.35: IC5.24 15.57,10.7 15.8,10.48 15.8,10 16.47,9.33 J2.5
N$30
  Top 0.35: IC5.25 15.88,11.35 16.65,10.58 J2.4
N$31
  Bottom 0.405: R22.1 C10.1 8.26,13.81 7.46,13.81 6.99,13.34 6.99,12.92 R21.2
N$32
  Top 0.35: IC4.4 10.61,6.69 10.56,6.75 | 10.56,6.75 10.56,6.43 10.48,6.51 10.32,6.51 | 10.56,6.75 10.32,6.51 | 10.32,6.51 9.22,6.51 R24.1
N$33
  Top 0.406: LED3.C D6.A
N$34
  Top 0.406: LED4.C D7.A
N$35
  Top 0.606: LED2.A R28.1
N$37
  Top 0.254: IC1.2 9.43,17.61 9.29,17.46 8.57,17.46
  Top 0.305: 8.57,17.46 8.26,17.14 R29.2
N$38
  Top 0.254: IC1.4 10.43,17.42
  Top 0.305: 10.43,17.42 10.32,17.3 10,17.3 9.76,17.07 9.76,16.92 R31.2
PWM_A
  Top 0.305: IC5.9 8.3,12.65 8.1,12.86 8.1,15.22 R29.1
PWM_B
  Top 0.305: IC5.8 9.25,13.3 9.37,13.41 9.29,13.49 | 9.29,13.49 8.97,13.49 | 8.97,13.49 8.89,13.41 | 8.97,13.49 9.05,13.57 | 9.05,13.57 9.21,13.57 | 9.21,13.57 9.29,13.49 | 9.21,13.57 9.13,13.65 | 9.05,13.57 9.13,13.65 | 9.13,13.65 9.13,14.68 9.29,14.84 9.29,15.22 R31.1
PWR_EN
  Top 0.35: R14.1 7.54,6.37 7.54,9.53 8.07,10.05 IC5.13
PWR_V+  (via drill 0.3 pad 0.61)
  Top 0.254: v2.54,8.57 2.78,8.81 3.81,8.81 3.97,8.81
  Top 0.35: v1.83,8.57 1.83,10 1.83,10.24 1.27,10.24
  Top 0.405: C1.1 4.03,8.57 v2.54,8.57 | IC3.3 1.13,13.89 R9.2
  Top 0.406: v1.83,8.57 1.67,8.41 | 1.98,8.57 v1.83,8.57 | v1.83,8.57 1.67,8.57 | 1.67,8.57 1.67,8.41 | 1.67,8.57 1.67,9.68 1.59,9.76 1.75,9.76 1.75,9.6 1.75,8.81 1.98,8.57 | 1.98,9.76 1.91,9.84 1.91,9.49 | 1.98,9.76 1.98,9.13 1.98,8.57 | v2.54,8.57 2.54,8.73 2.62,8.73 2.62,8.49 arc-90 2.54,8.41 | 2.54,8.41 2.7,8.41 | 2.7,8.41 2.7,8.73 | 2.7,8.73 2.14,8.73 2.14,8.57 arc90 2.3,8.41 | 2.3,8.41 2.54,8.41 | 2.3,8.41 1.67,8.41 | 1.67,8.41 arc-90 v1.83,8.57 | v1.83,8.57 v2.54,8.57 | 2.14,9.29 arc90 T3.2 2.14,9.29 | 2.14,9.29 2.55,8.89 2.7,8.89 | 2.7,8.89 2.7,8.73 | 2.7,8.89 2.7,9.05 | 2.7,9.05 2.62,9.13 1.98,9.76 | v2.54,8.57 2.54,8.41 | 2.7,8.41 3.49,8.41 3.81,8.73 3.81,8.81 2.94,8.81 2.7,9.05
  Top 0.6: v1.83,8.57 1.83,8.97 0.95,9.84 0.95,13.65 1.19,13.65 1.19,10.64 1.83,10 1.83,9.76 2.94,8.65 | 2.94,8.65 3.97,8.65 | 2.94,8.65 2.62,8.65 v2.54,8.57
  Top 0.606: R9.2 1.03,12.62 | 1.03,12.62 C4.1 1.03,10.32 | C3.1 1.11,12.7 1.03,12.62 | 1.98,9.76 2.05,9.76 R12.2 | 2.14,9.29 D5.K | 1.59,9.76 1.59,9.53 | 1.59,9.53 1.98,9.13 | 1.59,9.53 0.95,10.16 0.95,10.4 | 0.95,10.95 0.95,10.4 | 0.95,10.4 1.03,10.32 | 1.75,9.6 1.03,10.32
  Bottom 0.305: R17.2 5.54,10.49 5.16,10.48 3.69,10.48 T3.1
  Bottom 0.405: T4.1 0.68,6.63 | T4.3 2,6.75 | 2,6.75 2,7 2.66,7.66 2.66,8.53 | T4.1 0.68,6.87 1.03,7.22 1.27,7.22 1.67,7.62 1.67,8.57 1.34,8.9 T3.3 T3.2 T3.1 2.66,8.53 | 1.67,6.43 1.67,6.67 1.83,6.83 1.91,6.75 2,6.75 | T4.2 1.98,6.27 | T4.2 1.35,6.75 2.02,7.42 | 2.02,7.42 2.06,7.46 | 2.06,7.46 2.06,9.37 1.98,9.45 | 1.03,6.35 1.03,6.75 1.91,7.62 | 1.91,7.62 1.91,8.65 1.67,8.89 1.67,9.29 | 2.38,9.37 2.38,7.7 2.06,7.38 2.02,7.42 | 2.06,7.46 1.91,7.62 | T4.2 1.34,6.2 T4.2 T4.1 | 2.66,8.53 2.62,8.49 2.38,8.49 2.3,8.41 v2.54,8.57 2.54,8.41 T5.3
  Bottom 0.406: 1.98,9.45 1.98,8.73 1.91,8.65 v1.83,8.57 | 2.62,8.57 v2.54,8.57 arc90 2.46,8.49 2.46,8.41 2.7,8.41 2.7,8.57 | 2.7,8.57 2.7,8.73 2.62,8.73 2.62,8.57 | 2.62,8.57 2.7,8.57
PWR_VIN
  Bottom 0.405: T4.8 0.79,3.41
  Bottom 0.606: 0.79,3.41 0.87,3.41 T4.7
  Bottom 0.762: J1.1 4.37,1.91 4.37,2.78 3.73,3.41 0.87,3.41 0.88,3.41 T4.7 T4.6 T4.5
  Bottom 1.016: T4.EP 3.73,4.28 | 3.73,4.28 4.05,4.28 5.16,3.17 5.16,1.67 J1.1 | C12.1 3.73,4.29 3.73,4.28
TO_ADC_I  (via drill 0.3 pad 0.61)
  Top 0.35: 8.03,11.84 v8.02,11.83 | 8.02,11.99 8.1,11.99 8.18,11.91 8.18,11.75 8.1,11.67 7.94,11.67 7.86,11.75 7.86,11.91 7.94,11.99 8.02,11.99 | 8.02,11.99 v8.02,11.83 | IC5.10 8.19,12 v8.02,11.83
  Bottom 0.35: 8.02,11.99 8.1,11.99 8.18,11.91 8.18,11.75 8.1,11.67 7.94,11.67 7.86,11.75 7.86,11.91 7.94,11.99 8.02,11.99 | 8.02,11.99 v8.02,11.83
  Bottom 0.405: R22.2 8.26,12.06 v8.02,11.83
TO_ADC_V  (via drill 0.3 pad 0.61)
  Top 0.35: 8.03,10.86 v8.02,10.87 | 8.02,11.03 8.1,11.03 8.18,10.95 8.18,10.79 8.1,10.72 7.94,10.72 7.86,10.79 7.86,10.95 7.94,11.03 8.02,11.03 | 8.02,11.03 v8.02,10.87 | IC5.12 8.19,10.7 v8.02,10.87
  Bottom 0.35: 8.02,11.03 8.1,11.03 8.18,10.95 8.18,10.79 8.1,10.72 7.94,10.72 7.86,10.79 7.86,10.95 7.94,11.03 8.02,11.03 | 8.02,11.03 v8.02,10.87 | 8.18,10.72 v8.02,10.87 | R19.1 8.1,10.79 v8.02,10.87
V+
  Bottom 0.405: R_SNS.1 0.68,13.65 T3.5 | IC2.3 2.66,13.65 2.66,13.93 arc90 2.62,13.97 1.31,13.97 arc-90 R_SNS.1 | T3.EP 2,11.76 T3.7 | R_SNS.1 1.34,14.13 1.65,13.65 1.35,13.49 2,12.85 T3.7 | T3.7 1.59,12.3 1.59,13.26 1.03,13.26 | 1.03,13.26 1.03,13.49 | 1.03,13.26 1.03,12.38 | 1.98,12.38 1.98,12.54 1.98,12.7
  Bottom 0.406: 1.98,12.54 2.66,12.54 T3.8 2.66,12.38 1.03,12.38 | 1.65,13.65 1.67,13.65 1.67,12.94 1.35,12.94 1.35,13.02 1.34,13.02 T3.6

## Text on the board
Top: OpenServoCAN | Designed in / Greece
Bottom: Designed by El. Provatos
tPlace: LINK | PWR
bPlace: (CC) BY-NC-SA Ver.4 Int.